# EAGLE board Top General (EAGLE 9.6.2)
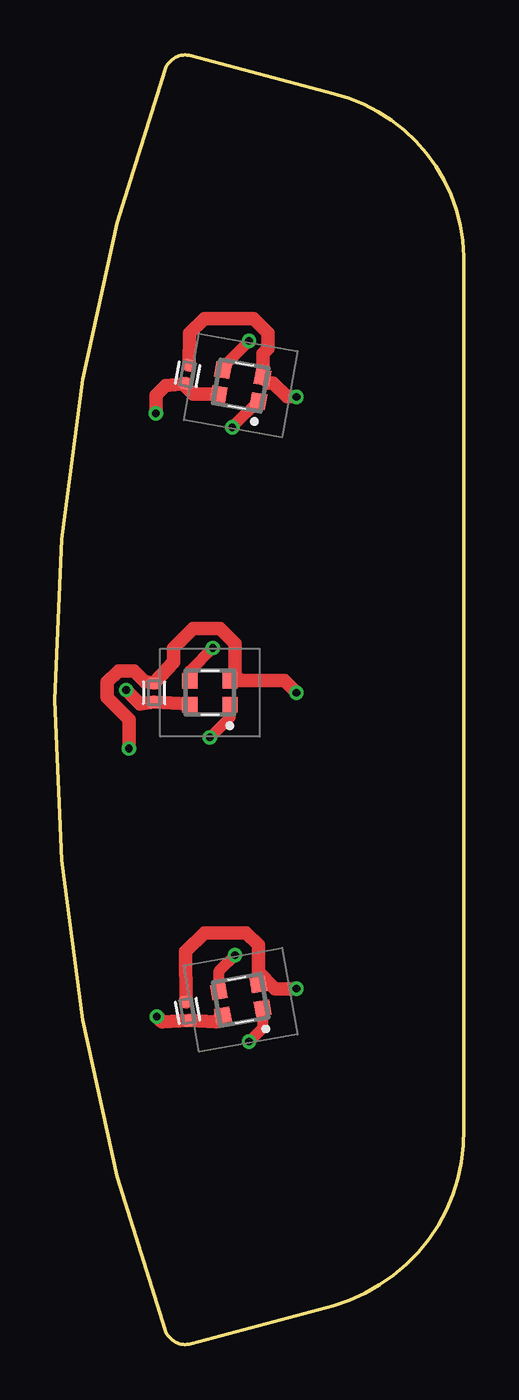
[diagram p0: board, top side]
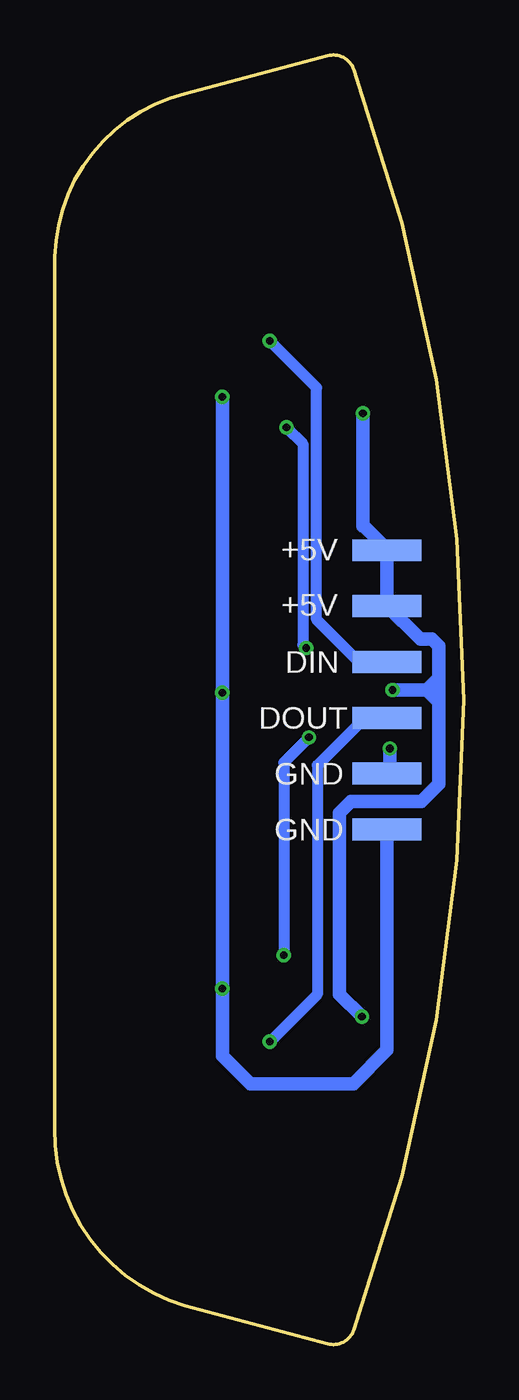
[diagram p1: board, bottom side, seen from below]

Size 18.61 x 58.65 mm. Coordinates in mm from the lower left corner, seen from the top.
Outline: 6.2,58.62 arc85 5.01,57.99 arc40 5.01,0.66 arc85 6.2,0.03 12.68,1.77 arc75 18.61,9.82 18.61,49.48 arc75 12.68,56.88 6.2,58.62
Copper layers (1*16): Top 0.035mm / dielectric 1.5mm / Bottom 0.035mm
Design rules "default *": minimum track width 5mil, minimum drill 0.3mm, track to track 5mil, track to pad 0.229mm, pad to pad 0.229mm, via to via 0.229mm, smd to smd 5mil, copper to edge 0.5mm, drill to drill 0.5mm, minimum pad ring 0.15mm, minimum via ring 0.15mm, stop-mask expansion 4mil, vias tented up to drill 0.35mm, thermal gap 10mil

## Footprints (pad centres in the part's own frame; a part is rotated, then mirrored left to right if it is on the bottom)
CAPC1005X55N-BACKUP = smd 0.54 x 0.6: 1 -0.43,0; 2 0.43,0
WS2812C2020 = smd 0.7 x 0.7: 1 0.915,-0.55; 2 0.915,0.55; 3 -0.915,0.55; 4 -0.915,-0.55
1X6PADS = smd 3.135 x 1: 1 0,6.35; 2 0,3.81; 3 0,1.27; 4 0,-1.27; 5 0,-3.81; 6 0,-6.35

## Placement (x,y rotation side)
C1  0.1uF  [CAPC1005X55N-BACKUP]  6.04,44.12 260 top
C2  0.1uF  [CAPC1005X55N-BACKUP]  4.51,29.65 270 top
C3  0.1uF  [CAPC1005X55N-BACKUP]  6.04,15.17 280 top
LED1  WS2812C-2020  [WS2812C2020]  8.45,43.62 350 top
LED2  WS2812C-2020  [WS2812C2020]  7.05,29.65 0 top
LED3  WS2812C-2020  [WS2812C2020]  8.45,15.68 10 top
SMDPADS  1X6PADS  [1X6PADS]  3.5,29.77 0 bottom

## Library data of the parts
C1-C3 = CC0402KRX7R5BB104
LED1-LED3 = WS2812C-2020; ARROW_PART_NUMBER: WS2812C-2020; DESCRIPTION: Intelligent control LED integrated light source; HEIGHT: 0.84mm; MANUFACTURER_NAME: Worldsemi; MANUFACTURER_PART_NUMBER: WS2812C-2020
SMDPADS = SMD Pads

## Nets
5V: C1.2 C2.2 C3.2 LED1.4 LED2.4 LED3.4 SMDPADS.1 SMDPADS.2
DIN: LED1.3 SMDPADS.3
DOUT: LED3.1 SMDPADS.4
GND: C1.1 C2.1 C3.1 LED1.2 LED2.2 LED3.2 SMDPADS.5 SMDPADS.6
N$1: LED1.1 LED2.3
N$2: LED2.1 LED3.3

## Tracks (layer width: path | path; a pad name or v marks a point on that pad's centre or on a via)
5V  (via drill 0.35)
  Top 0.61: LED2.4 6.1,29.14 C2.2 3.88,29.14 v3.24,29.77 | LED1.4 6.29,43.23 5.9,43.62 C1.2 5.03,43.62 4.6,43.19 v4.6,42.35 | LED3.4 7.34,14.67 C3.2 4.89,14.67 v4.64,14.91
  Bottom 0.61: 4.6,37.22 4.6,37.27 | 4.6,37.27 v4.6,42.35 | 1.69,29.77 v3.24,29.77 | 1.14,30.32 1.69,29.77 | 1.14,30.32 1.14,31.76 1.46,32.08 1.99,32.08 SMDPADS.2 SMDPADS.1 3.5,36.17 4.6,37.27 | 1.14,29.22 1.69,29.77 | 1.14,29.22 1.14,30.32 | v4.64,14.91 5.66,15.93 5.66,24.19 5.15,24.69 1.95,24.69 1.14,25.5 1.14,29.22
DIN  (via drill 0.35)
  Top 0.508: v8.83,45.65 7.65,44.46 LED1.3
  Bottom 0.508: SMDPADS.3 4.77,31.04 6.7,32.97 6.7,43.51 v8.83,45.65
DOUT  (via drill 0.35)
  Top 0.508: LED3.1 9.45,14.39 v8.83,13.77
  Bottom 0.508: v8.83,13.77 6.67,15.93 6.67,26.34 4.51,28.5 SMDPADS.4
GND  (via drill 0.35)
  Top 0.61: v3.37,27.11 3.37,28.43 2.39,29.42 2.39,30.13 2.89,30.63 3.6,30.63 4.08,30.15 C2.1 5.4,31.04 5.4,31.68 6.29,32.57 7.51,32.57 8.2,31.88 8.2,30.45 8.45,30.2 | C3.1 5.95,17.87 6.8,18.72 8.71,18.72 9.26,18.17 9.26,16.95 | 9.26,16.95 LED3.2 | 9.26,16.95 10.02,16.18 v10.99,16.18 | C1.1 6.13,45.99 6.8,46.66 9.03,46.66 9.69,46 9.69,45.29 9.47,45.07 9.47,44.02 LED1.2 9.71,43.73 9.93,43.73 10.55,43.11 v10.99,43.11 | LED2.2 8.45,30.2 | 8.45,30.2 10.44,30.2 v10.99,29.65
  Bottom 0.61: SMDPADS.5 3.37,26.09 v3.37,27.11 | SMDPADS.6 3.5,13.39 5.02,11.87 9.72,11.87 10.99,13.14 v10.99,16.18 v10.99,29.65 v10.99,43.11
N$1  (via drill 0.35)
  Top 0.508: LED1.1 8.07,41.73 v8.07,41.71 | v7.18,31.68 6.14,30.64 LED2.3
  Bottom 0.508: v8.07,41.71 7.33,40.97 7.33,31.83 v7.18,31.68
N$2  (via drill 0.35)
  Top 0.508: LED2.1 7.97,28.53 v7.05,27.61 | v8.2,17.71 7.45,16.97 LED3.3
  Bottom 0.508: v7.05,27.61 8.2,26.47 v8.2,17.71

## Text on the board
bPlace: +5V | +5V | DIN | DOUT | GND | GND